# Altium PCB IndicationBoard.PcbDoc
Units mm, origin at the board's own origin, x right, y up, seen from the top; angles counter-clockwise.
Board outline 107.5 x 44 mm, 2 copper layers (Top Layer, Bottom Layer), stack 1.571 mm thick; 76 components, 113 nets, 336 pads, 37 vias.
Unrouted connection lines stored in the file: 12.
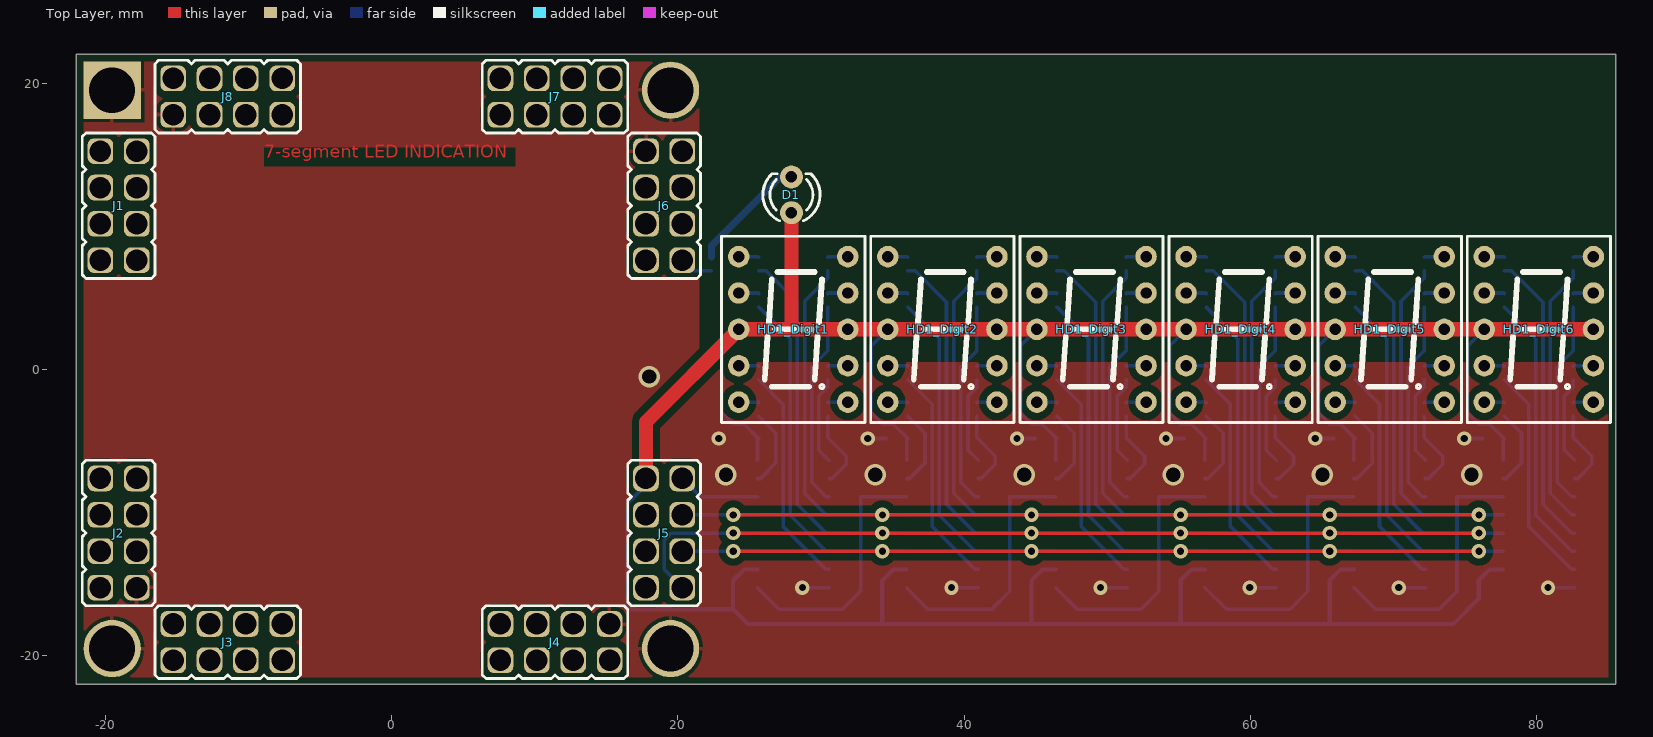
[diagram p0: Top Layer view]
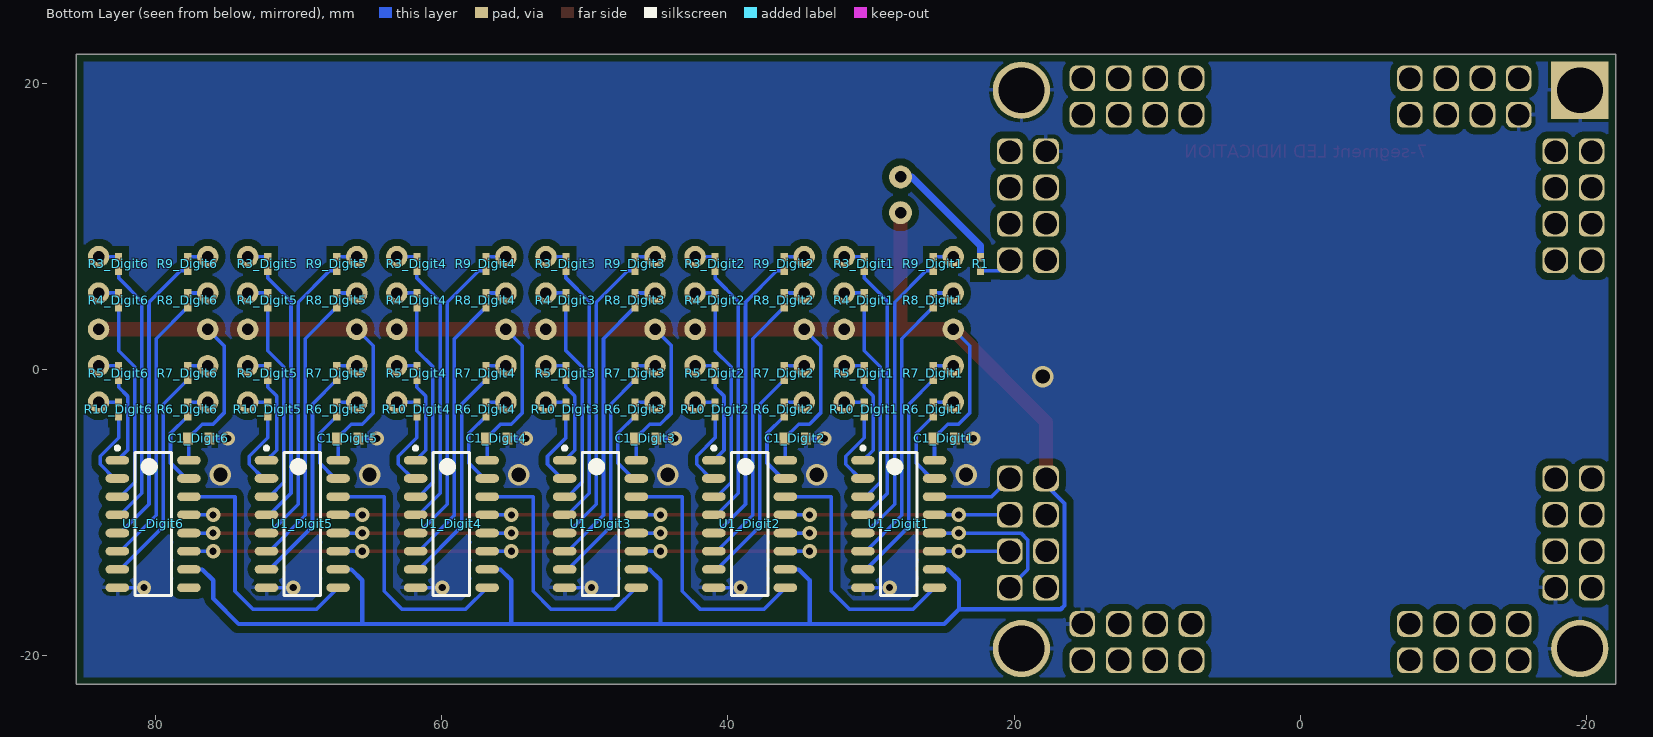
[diagram p1: Bottom Layer view, seen from below]

## Layer stack, top to bottom
Top Solder: solder mask 0.0102, Solder Resist, Dk 3.5
Top Layer: signal copper 0.0356
Dielectric 1: dielectric 1.5, FR-4, Dk 4.8
Bottom Layer: signal copper 0.0356
Bottom Solder: solder mask 0.0102, Solder Resist, Dk 3.5

## Board outline
-22,-22 -22,22 85.5,22 85.5,-22

## Design rules (kind name [scope] priority, off if disabled: settings)
Clearance Clearance_Text_GND [IsText vs InPolygon and InNet('GND')] p1: gap=0
Clearance Clearance_GND_GND [IsTrack and InNet('GND') vs InPolygon and InNet('GND')] p2: gap=0
Clearance Clearance_Polygon(GND) [InPolygon and InNet('GND')] p3: gap=0.5
Clearance [All] p4: gap=0.25
HoleSize [All] p1: absolutevalues=TRUE maxlimit=4 minlimit=0.3 maxpercent=80.000 minpercent=20.000
PolygonConnect PolygonConnect_Via(GND) [InNet('GND') vs IsVia] p1: connectstyle=Direct reliefconductorwidth=0.254 reliefentries=4 polygonreliefangle="90 Angle" airgapwidth=0.254
PolygonConnect [All] p2: connectstyle=Relief reliefconductorwidth=0.254 reliefentries=4 polygonreliefangle="90 Angle" airgapwidth=0.254
RoomDefinition Digit6 [InComponentClass('Digit6')] p1: confinementstyle=ConfineIn formatcopy=TRUE lockcomponents=FALSE outline 74.93,-18.288 85.344,-18.288 85.344,9.525 74.93,9.525
RoomDefinition Digit5 [InComponentClass('Digit5')] p2: confinementstyle=ConfineIn formatcopy=TRUE lockcomponents=FALSE outline 64.516,-18.288 74.93,-18.288 74.93,9.525 64.516,9.525
RoomDefinition Digit4 [InComponentClass('Digit4')] p3: confinementstyle=ConfineIn formatcopy=TRUE lockcomponents=FALSE outline 54.102,-18.288 64.516,-18.288 64.516,9.525 54.102,9.525
RoomDefinition Digit3 [InComponentClass('Digit3')] p4: confinementstyle=ConfineIn formatcopy=TRUE lockcomponents=FALSE outline 43.688,-18.288 54.102,-18.288 54.102,9.525 43.688,9.525
RoomDefinition Digit2 [InComponentClass('Digit2')] p5: confinementstyle=ConfineIn formatcopy=TRUE lockcomponents=FALSE outline 33.274,-18.288 43.688,-18.288 43.688,9.525 33.274,9.525
RoomDefinition Digit1 [InComponentClass('Digit1')] p6: confinementstyle=ConfineIn formatcopy=TRUE lockcomponents=FALSE outline 22.86,-18.288 33.274,-18.288 33.274,9.525 22.86,9.525
RoutingVias [All] p1: holewidth=0.5 width=1 viastyle="Through Hole" minholewidth=0.5 minwidth=1 maxholewidth=1.5 maxwidth=2
ShortCircuit ShortCircuit_Text_GND [InPolygon and InNet('GND') vs IsText] p1: allowed=TRUE
ShortCircuit [All] p2: allowed=FALSE
SolderMaskExpansion [All] p1: expansion=0.102
Width [All] p1: maxlimit=2 minlimit=0.25 preferedwidth=0.3
27 further rules are at their usual default settings.

## Classes and differential pairs
channel class OneDigitSubcircuit: Digit1 Digit2 Digit3 Digit4 Digit5 Digit6
net class OUT[1..6]: OUT6
net class IN[1..6]: IN1 IN2 IN3 IN4 IN5 IN6
component class IndicationBoard: D1 J1 J2 J3 J4 J5 J6 J7 J8 R1
component class Digit6: C1_Digit6 HD1_Digit6 R3_Digit6 R4_Digit6 R5_Digit6 R6_Digit6 R7_Digit6 R8_Digit6 R9_Digit6 R10_Digit6 U1_Digit6
component class Digit5: C1_Digit5 HD1_Digit5 R3_Digit5 R4_Digit5 R5_Digit5 R6_Digit5 R7_Digit5 R8_Digit5 R9_Digit5 R10_Digit5 U1_Digit5
component class Digit4: C1_Digit4 HD1_Digit4 R3_Digit4 R4_Digit4 R5_Digit4 R6_Digit4 R7_Digit4 R8_Digit4 R9_Digit4 R10_Digit4 U1_Digit4
component class Digit3: C1_Digit3 HD1_Digit3 R3_Digit3 R4_Digit3 R5_Digit3 R6_Digit3 R7_Digit3 R8_Digit3 R9_Digit3 R10_Digit3 U1_Digit3
component class Digit2: C1_Digit2 HD1_Digit2 R3_Digit2 R4_Digit2 R5_Digit2 R6_Digit2 R7_Digit2 R8_Digit2 R9_Digit2 R10_Digit2 U1_Digit2
component class Digit1: C1_Digit1 HD1_Digit1 R3_Digit1 R4_Digit1 R5_Digit1 R6_Digit1 R7_Digit1 R8_Digit1 R9_Digit1 R10_Digit1 U1_Digit1

## Components (designator, comment, footprint, x,y, rotation, side; value= is the part's Value field where it differs from the comment)
C1_Digit1 "0.1/25" CAP0603 24.892,-4.826 r0 bottom (schematic designator C1)
C1_Digit2 "0.1/25" CAP0603 35.306,-4.826 r0 bottom (schematic designator C1)
C1_Digit3 "0.1/25" CAP0603 45.72,-4.826 r0 bottom (schematic designator C1)
C1_Digit4 "0.1/25" CAP0603 56.134,-4.826 r0 bottom (schematic designator C1)
C1_Digit5 "0.1/25" CAP0603 66.548,-4.826 r0 bottom (schematic designator C1)
C1_Digit6 "0.1/25" CAP0603 76.962,-4.826 r0 bottom (schematic designator C1)
D1 "L-314" "LED 3mm" 27.94,12.192 r90 top
HD1_Digit1 "SA39-11" "39-11 7-segment" 28.067,2.794 r0 top (schematic designator HD1)
HD1_Digit2 "SA39-11" "39-11 7-segment" 38.481,2.794 r0 top (schematic designator HD1)
HD1_Digit3 "SA39-11" "39-11 7-segment" 48.895,2.794 r0 top (schematic designator HD1)
HD1_Digit4 "SA39-11" "39-11 7-segment" 59.309,2.794 r0 top (schematic designator HD1)
HD1_Digit5 "SA39-11" "39-11 7-segment" 69.723,2.794 r0 top (schematic designator HD1)
HD1_Digit6 "SA39-11" "39-11 7-segment" 80.137,2.794 r0 top (schematic designator HD1)
J1 "LEFT" PBDM-8 -19.05,11.43 r270 top
J2 "LEFT" PBDM-8 -19.05,-11.43 r270 top
J3 "BOTTOM" PBDM-8 -11.43,-19.05 r0 top
J4 "BOTTOM" PBDM-8 11.43,-19.05 r0 top
J5 "RIGHT" PBDM-8 19.05,-11.43 r90 top
J6 "RIGHT" PBDM-8 19.05,11.43 r90 top
J7 "TOP" PBDM-8 11.43,19.05 r180 top
J8 "TOP" PBDM-8 -11.43,19.05 r180 top
R1 "1k" RES0402 22.352,7.366 r270 bottom
R3_Digit1 "1k" RES0402 30.48,7.366 r270 bottom (schematic designator R3)
R3_Digit2 "1k" RES0402 40.894,7.366 r270 bottom (schematic designator R3)
R3_Digit3 "1k" RES0402 51.308,7.366 r270 bottom (schematic designator R3)
R3_Digit4 "1k" RES0402 61.722,7.366 r270 bottom (schematic designator R3)
R3_Digit5 "1k" RES0402 72.136,7.366 r270 bottom (schematic designator R3)
R3_Digit6 "1k" RES0402 82.55,7.366 r270 bottom (schematic designator R3)
R4_Digit1 "1k" RES0402 30.48,4.826 r270 bottom (schematic designator R4)
R4_Digit2 "1k" RES0402 40.894,4.826 r270 bottom (schematic designator R4)
R4_Digit3 "1k" RES0402 51.308,4.826 r270 bottom (schematic designator R4)
R4_Digit4 "1k" RES0402 61.722,4.826 r270 bottom (schematic designator R4)
R4_Digit5 "1k" RES0402 72.136,4.826 r270 bottom (schematic designator R4)
R4_Digit6 "1k" RES0402 82.55,4.826 r270 bottom (schematic designator R4)
R5_Digit1 "1k" RES0402 30.48,-0.254 r270 bottom (schematic designator R5)
R5_Digit2 "1k" RES0402 40.894,-0.254 r270 bottom (schematic designator R5)
R5_Digit3 "1k" RES0402 51.308,-0.254 r270 bottom (schematic designator R5)
R5_Digit4 "1k" RES0402 61.722,-0.254 r270 bottom (schematic designator R5)
R5_Digit5 "1k" RES0402 72.136,-0.254 r270 bottom (schematic designator R5)
R5_Digit6 "1k" RES0402 82.55,-0.254 r270 bottom (schematic designator R5)
R6_Digit1 "1k" RES0402 25.654,-2.794 r270 bottom (schematic designator R6)
R6_Digit2 "1k" RES0402 36.068,-2.794 r270 bottom (schematic designator R6)
R6_Digit3 "1k" RES0402 46.482,-2.794 r270 bottom (schematic designator R6)
R6_Digit4 "1k" RES0402 56.896,-2.794 r270 bottom (schematic designator R6)
R6_Digit5 "1k" RES0402 67.31,-2.794 r270 bottom (schematic designator R6)
R6_Digit6 "1k" RES0402 77.724,-2.794 r270 bottom (schematic designator R6)
R7_Digit1 "1k" RES0402 25.654,-0.254 r270 bottom (schematic designator R7)
R7_Digit2 "1k" RES0402 36.068,-0.254 r270 bottom (schematic designator R7)
R7_Digit3 "1k" RES0402 46.482,-0.254 r270 bottom (schematic designator R7)
R7_Digit4 "1k" RES0402 56.896,-0.254 r270 bottom (schematic designator R7)
R7_Digit5 "1k" RES0402 67.31,-0.254 r270 bottom (schematic designator R7)
R7_Digit6 "1k" RES0402 77.724,-0.254 r270 bottom (schematic designator R7)
R8_Digit1 "1k" RES0402 25.654,4.826 r270 bottom (schematic designator R8)
R8_Digit2 "1k" RES0402 36.068,4.826 r270 bottom (schematic designator R8)
R8_Digit3 "1k" RES0402 46.482,4.826 r270 bottom (schematic designator R8)
R8_Digit4 "1k" RES0402 56.896,4.826 r270 bottom (schematic designator R8)
R8_Digit5 "1k" RES0402 67.31,4.826 r270 bottom (schematic designator R8)
R8_Digit6 "1k" RES0402 77.724,4.826 r270 bottom (schematic designator R8)
R9_Digit1 "1k" RES0402 25.654,7.366 r270 bottom (schematic designator R9)
R9_Digit2 "1k" RES0402 36.068,7.366 r270 bottom (schematic designator R9)
R9_Digit3 "1k" RES0402 46.482,7.366 r270 bottom (schematic designator R9)
R9_Digit4 "1k" RES0402 56.896,7.366 r270 bottom (schematic designator R9)
R9_Digit5 "1k" RES0402 67.31,7.366 r270 bottom (schematic designator R9)
R9_Digit6 "1k" RES0402 77.724,7.366 r270 bottom (schematic designator R9)
R10_Digit1 "1k" RES0402 30.48,-2.794 r270 bottom (schematic designator R10)
R10_Digit2 "1k" RES0402 40.894,-2.794 r270 bottom (schematic designator R10)
R10_Digit3 "1k" RES0402 51.308,-2.794 r270 bottom (schematic designator R10)
R10_Digit4 "1k" RES0402 61.722,-2.794 r270 bottom (schematic designator R10)
R10_Digit5 "1k" RES0402 72.136,-2.794 r270 bottom (schematic designator R10)
R10_Digit6 "1k" RES0402 82.55,-2.794 r270 bottom (schematic designator R10)
U1_Digit1 "74HC595D" SO16 28.067,-10.795 r180 bottom (schematic designator U1)
U1_Digit2 "74HC595D" SO16 38.481,-10.795 r180 bottom (schematic designator U1)
U1_Digit3 "74HC595D" SO16 48.895,-10.795 r180 bottom (schematic designator U1)
U1_Digit4 "74HC595D" SO16 59.309,-10.795 r180 bottom (schematic designator U1)
U1_Digit5 "74HC595D" SO16 69.723,-10.795 r180 bottom (schematic designator U1)
U1_Digit6 "74HC595D" SO16 80.137,-10.795 r180 bottom (schematic designator U1)

## Footprints (in the part's own frame and the unit in brackets; to place one, negate y for a bottom-side part, rotate by r counter-clockwise, add the part's x,y. Pads: shape width x height; smd on the part's side, far side on the other; paste and mask are expansions set on the pad)
"39-11 7-segment" [mm]
  round 1.5 hole 0.8: 1(-3.81,5.08) 2(-3.81,2.54) 3(-3.81,0) 4(-3.81,-2.54) 5(-3.81,-5.08) 6(3.81,-5.08) 7(3.81,-2.54) 8(3.81,0) 9(3.81,2.54) 10(3.81,5.08)
  silkscreen extent -5,-6.5 5,6.5, body extent -5,-6.5 5,6.5, height 7
CAP0603 [mm]
  rect 0.7x0.85 smd: 1(-0.75,0) 2(0.75,0)
  body extent -0.8,-0.4 0.8,0.4, height 0.3
"LED 3mm" [mm] "3 mm diameter LED"
  round 1.6 hole 0.8: 1(1.25,0) 2(-1.25,0)
  silkscreen extent -1.81,-2 1.47,2, body extent -2,-2 1.52,2, height 5.8
PBDM-8 [mm] "5-pin interboard connector, pitch 2.54 mm"
  rrect50% 1.79x1.79 hole 1.5: 1(-3.81,-1.27) 2(-3.81,1.27) 3(-1.27,-1.27) 4(-1.27,1.27) 5(1.27,-1.27) 6(1.27,1.27) 7(3.81,-1.27) 8(3.81,1.27)
  silkscreen extent -5.08,-2.54 5.08,2.54, body extent -5.08,-2.54 5.08,2.54, height 3
RES0402 [mm]
  rect 0.6x0.5 smd: 1(-0.475,0) 2(0.475,0)
  body extent -0.53,-0.28 0.53,0.28, height 0.35
SO16 [mm]
  oval 1.65x0.6 smd: 1(-2.5,4.445) 2(-2.5,3.175) 3(-2.5,1.905) 4(-2.5,0.635) 5(-2.5,-0.635) 6(-2.5,-1.905) 7(-2.5,-3.175) 8(-2.5,-4.445) 9(2.5,-4.445) 10(2.5,-3.175) 11(2.5,-1.905) 12(2.5,-0.635) 13(2.5,0.635) 14(2.5,1.905) 15(2.5,3.175) 16(2.5,4.445)
  silkscreen extent -2.63,-5 1.27,5.42, body extent -2,-5 2,5, height 1.75

## Part data
C1_Digit1 C1_Digit2 C1_Digit3 C1_Digit4 C1_Digit5 C1_Digit6: library part CAP0603, "Ceramic chip capacitor 0603"
D1: "3-mm LED"
HD1_Digit1 HD1_Digit2 HD1_Digit3 HD1_Digit4 HD1_Digit5 HD1_Digit6: "9.9mm (0.39INCH) Single Digit 7-Segment Numeric Display (Common Anode)"
J1 J2 J3 J4 J5 J6 J7 J8: library part PBDM-8, "2x4-pin header, pitch 2.54 mm"
R1 R3_Digit1 R3_Digit2 R3_Digit3 R3_Digit4 R3_Digit5 R3_Digit6 R4_Digit1 R4_Digit2 R4_Digit3 R4_Digit4 R4_Digit5 R4_Digit6 R5_Digit1 R5_Digit2 R5_Digit3 R5_Digit4 R5_Digit5 R5_Digit6 R6_Digit1 R6_Digit2 R6_Digit3 R6_Digit4 R6_Digit5 R6_Digit6 R7_Digit1 R7_Digit2 R7_Digit3 R7_Digit4 R7_Digit5 R7_Digit6 R8_Digit1 R8_Digit2 R8_Digit3 R8_Digit4 R8_Digit5 R8_Digit6 R9_Digit1 R9_Digit2 R9_Digit3 R9_Digit4 R9_Digit5 R9_Digit6 R10_Digit1 R10_Digit2 R10_Digit3 R10_Digit4 R10_Digit5 R10_Digit6: library part RES0402, "Ceramic chip resistor"
U1_Digit1 U1_Digit2 U1_Digit3 U1_Digit4 U1_Digit5 U1_Digit6: "8-bit serial-in, serial or parallel-out shift register with output latches; 3-state"

## Free pads (board coordinates)
  round 4 hole 3.2: 0(-19.5,-19.5) 0(19.5,-19.5) 0(19.5,19.5)
  rect 4x4 hole 3.2: 0(-19.5,19.5)

## Via types
v1: diameter 1, hole 0.5, Top Layer to Bottom Layer, 30 vias
v2: diameter 1.5, hole 1, Top Layer to Bottom Layer, 7 vias

## Nets (pads, with @x,y where several pads share a name; then routed paths per layer and width w, separated by ;. In a path a pad name is that pad's centre, name@x,y a point inside that pad or via, vN(x,y) a via of type N, cw(c..) or ccw(c..) an arc to the next point about the centre after c; other vN are vias at no path point)
+5V: J1.6 J3.6 J5.6 J7.6
+12V: J1.2 J3.2 J5.2 J7.2
+VDD_Digit1: C1_Digit1.2 C1_Digit2.2 C1_Digit3.2 C1_Digit4.2 C1_Digit5.2 C1_Digit6.2 D1.2 HD1_Digit1.3 HD1_Digit1.8 HD1_Digit2.3 HD1_Digit2.8 HD1_Digit3.3 HD1_Digit3.8 HD1_Digit4.3 HD1_Digit4.8 HD1_Digit5.3 HD1_Digit5.8 HD1_Digit6.3 HD1_Digit6.8 J1.8 J3.8 J5.8 J7.8 U1_Digit1.10 U1_Digit1.16 U1_Digit2.10 U1_Digit2.16 U1_Digit3.10 U1_Digit3.16 U1_Digit4.10 U1_Digit4.16 U1_Digit5.10 U1_Digit5.16 U1_Digit6.10 U1_Digit6.16 | length 246.5
  Top Layer w1: J5.8 17.78,-3.683 HD1_Digit1.3 27.94,2.794 ; D1.2 27.94,2.794 ; HD1_Digit6.8 HD1_Digit6.3 HD1_Digit5.8 HD1_Digit5.3 HD1_Digit4.8 HD1_Digit4.3 HD1_Digit3.8 HD1_Digit3.3 HD1_Digit2.8 HD1_Digit2.3 HD1_Digit1.8 27.94,2.794
  Bottom Layer w0.25: HD1_Digit1.3 23.114,1.651 23.114,-3.048 23.888,-3.822 24.638,-3.822 C1_Digit1.2 25.567,-4.901 U1_Digit1.16 ; HD1_Digit2.3 33.528,1.651 33.528,-3.048 34.302,-3.822 35.052,-3.822 C1_Digit2.2 35.981,-4.901 U1_Digit2.16 ; HD1_Digit3.3 43.942,1.651 43.942,-3.048 44.716,-3.822 45.466,-3.822 C1_Digit3.2 46.395,-4.901 U1_Digit3.16 ; HD1_Digit4.3 54.356,1.651 54.356,-3.048 55.13,-3.822 55.88,-3.822 C1_Digit4.2 56.809,-4.901 U1_Digit4.16 ; HD1_Digit5.3 64.77,1.651 64.77,-3.048 65.544,-3.822 66.294,-3.822 C1_Digit5.2 67.223,-4.901 U1_Digit5.16 ; HD1_Digit6.3 75.184,1.651 75.184,-3.048 75.958,-3.822 76.708,-3.822 C1_Digit6.2 77.637,-4.901 U1_Digit6.16
  Bottom Layer w0.3: J5.8 17.78,-8.066 16.485,-9.361 16.485,-16.485 16.75,-16.75 23.862,-16.75 ; 23.876,-14.732 24.638,-13.97 ; U1_Digit1.10 24.638,-13.97 ; U1_Digit2.10 35.052,-13.97 34.29,-14.732 34.29,-17.78 ; U1_Digit3.10 45.466,-13.97 44.704,-14.732 44.704,-17.78 ; U1_Digit4.10 55.88,-13.97 55.118,-14.732 55.118,-17.78 ; U1_Digit5.10 66.294,-13.97 65.532,-14.732 65.532,-17.78 ; U1_Digit6.10 76.708,-13.97 75.946,-14.732 75.946,-16.002 74.168,-17.78 65.532,-17.78 ; 23.862,-16.75 24.892,-17.78 34.29,-17.78 ; 23.862,-16.75 23.862,-14.732 24.624,-13.97 24.638,-13.97 ; 34.29,-17.78 44.704,-17.78 ; 44.704,-17.78 55.118,-17.78 ; 55.118,-17.78 65.532,-17.78
CLK: J5.3 U1_Digit1.11 U1_Digit2.11 U1_Digit3.11 U1_Digit4.11 U1_Digit5.11 U1_Digit6.11 | length 65.8
  Top Layer w0.25: v1(23.876,-12.7) v1(34.29,-12.7) v1(44.704,-12.7) v1(55.118,-12.7) v1(65.532,-12.7) v1(75.946,-12.7)
  Bottom Layer w0.25: J5.3 v1(23.876,-12.7) U1_Digit1.11 ; v1(34.29,-12.7) U1_Digit2.11 ; v1(44.704,-12.7) U1_Digit3.11 ; v1(55.118,-12.7) U1_Digit4.11 ; v1(65.532,-12.7) U1_Digit5.11 ; v1(75.946,-12.7) U1_Digit6.11
GND: C1_Digit1.1 C1_Digit2.1 C1_Digit3.1 C1_Digit4.1 C1_Digit5.1 C1_Digit6.1 J2.8 J4.8 J6.8 J8.8 pad.0 U1_Digit1.8 U1_Digit2.8 U1_Digit3.8 U1_Digit4.8 U1_Digit5.8 U1_Digit6.8 | length 17.6
  Bottom Layer w0.25: v1(28.702,-15.24) U1_Digit1.8 ; v1(33.274,-4.826) C1_Digit2.1 ; v1(39.116,-15.24) U1_Digit2.8 ; v1(43.688,-4.826) C1_Digit3.1 ; v1(49.53,-15.24) U1_Digit3.8 ; v1(54.102,-4.826) C1_Digit4.1 ; v1(59.944,-15.24) U1_Digit4.8 ; v1(64.516,-4.826) C1_Digit5.1 ; v1(70.358,-15.24) U1_Digit5.8 ; v1(74.93,-4.826) C1_Digit6.1 ; v1(80.772,-15.24) U1_Digit6.8
  other v1: 22.86,-4.826
  other v2: 23.368,-7.366 33.782,-7.366 44.196,-7.366 54.61,-7.366 65.024,-7.366 75.438,-7.366 18,-0.5
IN1: J5.7 U1_Digit1.14 | length 5.8
  Bottom Layer w0.25: J5.7 21.59,-8.89 U1_Digit1.14
IN2: U1_Digit1.9 U1_Digit2.14 | length 18.2
  Bottom Layer w0.25: U1_Digit1.9 27.091,-16.764 31.496,-16.764 32.766,-15.494 32.766,-8.89 U1_Digit2.14
IN3: U1_Digit2.9 U1_Digit3.14 | length 18.2
  Bottom Layer w0.25: U1_Digit2.9 37.505,-16.764 41.91,-16.764 43.18,-15.494 43.18,-8.89 U1_Digit3.14
IN4: U1_Digit3.9 U1_Digit4.14 | length 18.2
  Bottom Layer w0.25: U1_Digit3.9 47.919,-16.764 52.324,-16.764 53.594,-15.494 53.594,-8.89 U1_Digit4.14
IN5: U1_Digit4.9 U1_Digit5.14 | length 18.2
  Bottom Layer w0.25: U1_Digit4.9 58.333,-16.764 62.738,-16.764 64.008,-15.494 64.008,-8.89 U1_Digit5.14
IN6: U1_Digit5.9 U1_Digit6.14 | length 18.2
  Bottom Layer w0.25: U1_Digit5.9 68.747,-16.764 73.152,-16.764 74.422,-15.494 74.422,-8.89 U1_Digit6.14
LATCH: J5.1 U1_Digit1.12 U1_Digit2.12 U1_Digit3.12 U1_Digit4.12 U1_Digit5.12 U1_Digit6.12 | length 71.1
  Top Layer w0.25: v1(23.876,-11.43) v1(34.29,-11.43) v1(44.704,-11.43) v1(55.118,-11.43) v1(65.532,-11.43) v1(75.946,-11.43)
  Bottom Layer w0.25: J5.1 19.05,-13.97 19.05,-11.912 19.532,-11.43 v1(23.876,-11.43) U1_Digit1.12 ; v1(34.29,-11.43) U1_Digit2.12 ; v1(44.704,-11.43) U1_Digit3.12 ; v1(55.118,-11.43) U1_Digit4.12 ; v1(65.532,-11.43) U1_Digit5.12 ; v1(75.946,-11.43) U1_Digit6.12
NetD1_1: D1.1 R1.1 | length 8.4
  Bottom Layer w0.5: R1.1 22.352,8.636 27.158,13.442 D1.1
NetHD1_Digit1_1: HD1_Digit1.1 R9_Digit1.1 | length 1.4
  Bottom Layer w0.25: HD1_Digit1.1 25.621,7.874 R9_Digit1.1
NetHD1_Digit1_2: HD1_Digit1.2 R8_Digit1.1 | length 1.4
  Bottom Layer w0.25: HD1_Digit1.2 25.621,5.334 R8_Digit1.1
NetHD1_Digit1_4: HD1_Digit1.4 R7_Digit1.1 | length 1.4
  Bottom Layer w0.25: HD1_Digit1.4 25.621,0.254 R7_Digit1.1
NetHD1_Digit1_5: HD1_Digit1.5 R6_Digit1.1 | length 1.4
  Bottom Layer w0.25: HD1_Digit1.5 25.621,-2.286 R6_Digit1.1
NetHD1_Digit1_6: HD1_Digit1.6 R10_Digit1.1 | length 1.4
  Bottom Layer w0.25: R10_Digit1.1 30.513,-2.286 HD1_Digit1.6
NetHD1_Digit1_7: HD1_Digit1.7 R5_Digit1.1 | length 1.4
  Bottom Layer w0.25: R5_Digit1.1 30.513,0.254 HD1_Digit1.7
NetHD1_Digit1_9: HD1_Digit1.9 R4_Digit1.1 | length 1.4
  Bottom Layer w0.25: R4_Digit1.1 30.513,5.334 HD1_Digit1.9
NetHD1_Digit1_10: HD1_Digit1.10 R3_Digit1.1 | length 1.4
  Bottom Layer w0.25: R3_Digit1.1 30.513,7.874 HD1_Digit1.10
NetHD1_Digit2_1: HD1_Digit2.1 R9_Digit2.1 | length 1.4
  Bottom Layer w0.25: HD1_Digit2.1 36.035,7.874 R9_Digit2.1
NetHD1_Digit2_2: HD1_Digit2.2 R8_Digit2.1 | length 1.4
  Bottom Layer w0.25: HD1_Digit2.2 36.035,5.334 R8_Digit2.1
NetHD1_Digit2_4: HD1_Digit2.4 R7_Digit2.1 | length 1.4
  Bottom Layer w0.25: HD1_Digit2.4 36.035,0.254 R7_Digit2.1
NetHD1_Digit2_5: HD1_Digit2.5 R6_Digit2.1 | length 1.4
  Bottom Layer w0.25: HD1_Digit2.5 36.035,-2.286 R6_Digit2.1
NetHD1_Digit2_6: HD1_Digit2.6 R10_Digit2.1 | length 1.4
  Bottom Layer w0.25: R10_Digit2.1 40.927,-2.286 HD1_Digit2.6
NetHD1_Digit2_7: HD1_Digit2.7 R5_Digit2.1 | length 1.4
  Bottom Layer w0.25: R5_Digit2.1 40.927,0.254 HD1_Digit2.7
NetHD1_Digit2_9: HD1_Digit2.9 R4_Digit2.1 | length 1.4
  Bottom Layer w0.25: R4_Digit2.1 40.927,5.334 HD1_Digit2.9
NetHD1_Digit2_10: HD1_Digit2.10 R3_Digit2.1 | length 1.4
  Bottom Layer w0.25: R3_Digit2.1 40.927,7.874 HD1_Digit2.10
NetHD1_Digit3_1: HD1_Digit3.1 R9_Digit3.1 | length 1.4
  Bottom Layer w0.25: HD1_Digit3.1 46.449,7.874 R9_Digit3.1
NetHD1_Digit3_2: HD1_Digit3.2 R8_Digit3.1 | length 1.4
  Bottom Layer w0.25: HD1_Digit3.2 46.449,5.334 R8_Digit3.1
NetHD1_Digit3_4: HD1_Digit3.4 R7_Digit3.1 | length 1.4
  Bottom Layer w0.25: HD1_Digit3.4 46.449,0.254 R7_Digit3.1
NetHD1_Digit3_5: HD1_Digit3.5 R6_Digit3.1 | length 1.4
  Bottom Layer w0.25: HD1_Digit3.5 46.449,-2.286 R6_Digit3.1
NetHD1_Digit3_6: HD1_Digit3.6 R10_Digit3.1 | length 1.4
  Bottom Layer w0.25: R10_Digit3.1 51.341,-2.286 HD1_Digit3.6
NetHD1_Digit3_7: HD1_Digit3.7 R5_Digit3.1 | length 1.4
  Bottom Layer w0.25: R5_Digit3.1 51.341,0.254 HD1_Digit3.7
NetHD1_Digit3_9: HD1_Digit3.9 R4_Digit3.1 | length 1.4
  Bottom Layer w0.25: R4_Digit3.1 51.341,5.334 HD1_Digit3.9
NetHD1_Digit3_10: HD1_Digit3.10 R3_Digit3.1 | length 1.4
  Bottom Layer w0.25: R3_Digit3.1 51.341,7.874 HD1_Digit3.10
NetHD1_Digit4_1: HD1_Digit4.1 R9_Digit4.1 | length 1.4
  Bottom Layer w0.25: HD1_Digit4.1 56.863,7.874 R9_Digit4.1
NetHD1_Digit4_2: HD1_Digit4.2 R8_Digit4.1 | length 1.4
  Bottom Layer w0.25: HD1_Digit4.2 56.863,5.334 R8_Digit4.1
NetHD1_Digit4_4: HD1_Digit4.4 R7_Digit4.1 | length 1.4
  Bottom Layer w0.25: HD1_Digit4.4 56.863,0.254 R7_Digit4.1
NetHD1_Digit4_5: HD1_Digit4.5 R6_Digit4.1 | length 1.4
  Bottom Layer w0.25: HD1_Digit4.5 56.863,-2.286 R6_Digit4.1
NetHD1_Digit4_6: HD1_Digit4.6 R10_Digit4.1 | length 1.4
  Bottom Layer w0.25: R10_Digit4.1 61.755,-2.286 HD1_Digit4.6
NetHD1_Digit4_7: HD1_Digit4.7 R5_Digit4.1 | length 1.4
  Bottom Layer w0.25: R5_Digit4.1 61.755,0.254 HD1_Digit4.7
NetHD1_Digit4_9: HD1_Digit4.9 R4_Digit4.1 | length 1.4
  Bottom Layer w0.25: R4_Digit4.1 61.755,5.334 HD1_Digit4.9
NetHD1_Digit4_10: HD1_Digit4.10 R3_Digit4.1 | length 1.4
  Bottom Layer w0.25: R3_Digit4.1 61.755,7.874 HD1_Digit4.10
NetHD1_Digit5_1: HD1_Digit5.1 R9_Digit5.1 | length 1.4
  Bottom Layer w0.25: HD1_Digit5.1 67.277,7.874 R9_Digit5.1
NetHD1_Digit5_2: HD1_Digit5.2 R8_Digit5.1 | length 1.4
  Bottom Layer w0.25: HD1_Digit5.2 67.277,5.334 R8_Digit5.1
NetHD1_Digit5_4: HD1_Digit5.4 R7_Digit5.1 | length 1.4
  Bottom Layer w0.25: HD1_Digit5.4 67.277,0.254 R7_Digit5.1
NetHD1_Digit5_5: HD1_Digit5.5 R6_Digit5.1 | length 1.4
  Bottom Layer w0.25: HD1_Digit5.5 67.277,-2.286 R6_Digit5.1
NetHD1_Digit5_6: HD1_Digit5.6 R10_Digit5.1 | length 1.4
  Bottom Layer w0.25: R10_Digit5.1 72.169,-2.286 HD1_Digit5.6
NetHD1_Digit5_7: HD1_Digit5.7 R5_Digit5.1 | length 1.4
  Bottom Layer w0.25: R5_Digit5.1 72.169,0.254 HD1_Digit5.7
NetHD1_Digit5_9: HD1_Digit5.9 R4_Digit5.1 | length 1.4
  Bottom Layer w0.25: R4_Digit5.1 72.169,5.334 HD1_Digit5.9
NetHD1_Digit5_10: HD1_Digit5.10 R3_Digit5.1 | length 1.4
  Bottom Layer w0.25: R3_Digit5.1 72.169,7.874 HD1_Digit5.10
NetHD1_Digit6_1: HD1_Digit6.1 R9_Digit6.1 | length 1.4
  Bottom Layer w0.25: HD1_Digit6.1 77.691,7.874 R9_Digit6.1
NetHD1_Digit6_2: HD1_Digit6.2 R8_Digit6.1 | length 1.4
  Bottom Layer w0.25: HD1_Digit6.2 77.691,5.334 R8_Digit6.1
NetHD1_Digit6_4: HD1_Digit6.4 R7_Digit6.1 | length 1.4
  Bottom Layer w0.25: HD1_Digit6.4 77.691,0.254 R7_Digit6.1
NetHD1_Digit6_5: HD1_Digit6.5 R6_Digit6.1 | length 1.4
  Bottom Layer w0.25: HD1_Digit6.5 77.691,-2.286 R6_Digit6.1
NetHD1_Digit6_6: HD1_Digit6.6 R10_Digit6.1 | length 1.4
  Bottom Layer w0.25: R10_Digit6.1 82.583,-2.286 HD1_Digit6.6
NetHD1_Digit6_7: HD1_Digit6.7 R5_Digit6.1 | length 1.4
  Bottom Layer w0.25: R5_Digit6.1 82.583,0.254 HD1_Digit6.7
NetHD1_Digit6_9: HD1_Digit6.9 R4_Digit6.1 | length 1.4
  Bottom Layer w0.25: R4_Digit6.1 82.583,5.334 HD1_Digit6.9
NetHD1_Digit6_10: HD1_Digit6.10 R3_Digit6.1 | length 1.4
  Bottom Layer w0.25: R3_Digit6.1 82.583,7.874 HD1_Digit6.10
NetJ6_1: J6.1 R1.2 | length 2.3
  Bottom Layer w0.25: J6.1 21.049,6.891 R1.2
NetR3_Digit1_2: R3_Digit1.2 U1_Digit1.4 | length 18.6
  Bottom Layer w0.25: R3_Digit1.2 30.48,6.381 28.855,4.756 28.855,-8.658 30.357,-10.16 U1_Digit1.4
NetR3_Digit2_2: R3_Digit2.2 U1_Digit2.4 | length 18.6
  Bottom Layer w0.25: R3_Digit2.2 40.894,6.381 39.269,4.756 39.269,-8.658 40.771,-10.16 U1_Digit2.4
NetR3_Digit3_2: R3_Digit3.2 U1_Digit3.4 | length 18.6
  Bottom Layer w0.25: R3_Digit3.2 51.308,6.381 49.683,4.756 49.683,-8.658 51.185,-10.16 U1_Digit3.4
NetR3_Digit4_2: R3_Digit4.2 U1_Digit4.4 | length 18.6
  Bottom Layer w0.25: R3_Digit4.2 61.722,6.381 60.097,4.756 60.097,-8.658 61.599,-10.16 U1_Digit4.4
NetR3_Digit5_2: R3_Digit5.2 U1_Digit5.4 | length 18.6
  Bottom Layer w0.25: R3_Digit5.2 72.136,6.381 70.511,4.756 70.511,-8.658 72.013,-10.16 U1_Digit5.4
NetR3_Digit6_2: R3_Digit6.2 U1_Digit6.4 | length 18.6
  Bottom Layer w0.25: R3_Digit6.2 82.55,6.381 80.925,4.756 80.925,-8.658 82.427,-10.16 U1_Digit6.4
NetR4_Digit1_2: R4_Digit1.2 U1_Digit1.3 | length 14.3
  Bottom Layer w0.25: R4_Digit1.2 30.48,1.301 29.355,0.176 29.355,-7.888 30.357,-8.89 U1_Digit1.3
NetR4_Digit2_2: R4_Digit2.2 U1_Digit2.3 | length 14.3
  Bottom Layer w0.25: R4_Digit2.2 40.894,1.301 39.769,0.176 39.769,-7.888 40.771,-8.89 U1_Digit2.3
NetR4_Digit3_2: R4_Digit3.2 U1_Digit3.3 | length 14.3
  Bottom Layer w0.25: R4_Digit3.2 51.308,1.301 50.183,0.176 50.183,-7.888 51.185,-8.89 U1_Digit3.3
NetR4_Digit4_2: R4_Digit4.2 U1_Digit4.3 | length 14.3
  Bottom Layer w0.25: R4_Digit4.2 61.722,1.301 60.597,0.176 60.597,-7.888 61.599,-8.89 U1_Digit4.3
NetR4_Digit5_2: R4_Digit5.2 U1_Digit5.3 | length 14.3
  Bottom Layer w0.25: R4_Digit5.2 72.136,1.301 71.011,0.176 71.011,-7.888 72.013,-8.89 U1_Digit5.3
NetR4_Digit6_2: R4_Digit6.2 U1_Digit6.3 | length 14.3
  Bottom Layer w0.25: R4_Digit6.2 82.55,1.301 81.425,0.176 81.425,-7.888 82.427,-8.89 U1_Digit6.3
NetR5_Digit1_2: R5_Digit1.2 U1_Digit1.1 | length 6.2
  Bottom Layer w0.25: R5_Digit1.2 30.48,-1.239 29.855,-1.864 29.855,-5.638 U1_Digit1.1
NetR5_Digit2_2: R5_Digit2.2 U1_Digit2.1 | length 6.2
  Bottom Layer w0.25: R5_Digit2.2 40.894,-1.239 40.269,-1.864 40.269,-5.638 U1_Digit2.1
NetR5_Digit3_2: R5_Digit3.2 U1_Digit3.1 | length 6.2
  Bottom Layer w0.25: R5_Digit3.2 51.308,-1.239 50.683,-1.864 50.683,-5.638 U1_Digit3.1
NetR5_Digit4_2: R5_Digit4.2 U1_Digit4.1 | length 6.2
  Bottom Layer w0.25: R5_Digit4.2 61.722,-1.239 61.097,-1.864 61.097,-5.638 U1_Digit4.1
NetR5_Digit5_2: R5_Digit5.2 U1_Digit5.1 | length 6.2
  Bottom Layer w0.25: R5_Digit5.2 72.136,-1.239 71.511,-1.864 71.511,-5.638 U1_Digit5.1
NetR5_Digit6_2: R5_Digit6.2 U1_Digit6.1 | length 6.2
  Bottom Layer w0.25: R5_Digit6.2 82.55,-1.239 81.925,-1.864 81.925,-5.638 U1_Digit6.1
NetR6_Digit1_2: R6_Digit1.2 U1_Digit1.15 | length 5.5
  Bottom Layer w0.25: U1_Digit1.15 25.777,-7.62 26.855,-6.542 26.855,-4.47 R6_Digit1.2
NetR6_Digit2_2: R6_Digit2.2 U1_Digit2.15 | length 5.5
  Bottom Layer w0.25: U1_Digit2.15 36.191,-7.62 37.269,-6.542 37.269,-4.47 R6_Digit2.2
NetR6_Digit3_2: R6_Digit3.2 U1_Digit3.15 | length 5.5
  Bottom Layer w0.25: U1_Digit3.15 46.605,-7.62 47.683,-6.542 47.683,-4.47 R6_Digit3.2
NetR6_Digit4_2: R6_Digit4.2 U1_Digit4.15 | length 5.5
  Bottom Layer w0.25: U1_Digit4.15 57.019,-7.62 58.097,-6.542 58.097,-4.47 R6_Digit4.2
NetR6_Digit5_2: R6_Digit5.2 U1_Digit5.15 | length 5.5
  Bottom Layer w0.25: U1_Digit5.15 67.433,-7.62 68.511,-6.542 68.511,-4.47 R6_Digit5.2
NetR6_Digit6_2: R6_Digit6.2 U1_Digit6.15 | length 5.5
  Bottom Layer w0.25: U1_Digit6.15 77.847,-7.62 78.925,-6.542 78.925,-4.47 R6_Digit6.2
NetR7_Digit1_2: R7_Digit1.2 U1_Digit1.7 | length 15.4
  Bottom Layer w0.25: R7_Digit1.2 27.355,-2.43 27.355,-10.968 30.357,-13.97 U1_Digit1.7
NetR7_Digit2_2: R7_Digit2.2 U1_Digit2.7 | length 15.4
  Bottom Layer w0.25: R7_Digit2.2 37.769,-2.43 37.769,-10.968 40.771,-13.97 U1_Digit2.7
NetR7_Digit3_2: R7_Digit3.2 U1_Digit3.7 | length 15.4
  Bottom Layer w0.25: R7_Digit3.2 48.183,-2.43 48.183,-10.968 51.185,-13.97 U1_Digit3.7
NetR7_Digit4_2: R7_Digit4.2 U1_Digit4.7 | length 15.4
  Bottom Layer w0.25: R7_Digit4.2 58.597,-2.43 58.597,-10.968 61.599,-13.97 U1_Digit4.7
NetR7_Digit5_2: R7_Digit5.2 U1_Digit5.7 | length 15.4
  Bottom Layer w0.25: R7_Digit5.2 69.011,-2.43 69.011,-10.968 72.013,-13.97 U1_Digit5.7
NetR7_Digit6_2: R7_Digit6.2 U1_Digit6.7 | length 15.4
  Bottom Layer w0.25: R7_Digit6.2 79.425,-2.43 79.425,-10.968 82.427,-13.97 U1_Digit6.7
NetR8_Digit1_2: R8_Digit1.2 U1_Digit1.6 | length 19.2
  Bottom Layer w0.25: R8_Digit1.2 27.855,2.15 27.855,-10.198 30.357,-12.7 U1_Digit1.6
NetR8_Digit2_2: R8_Digit2.2 U1_Digit2.6 | length 19.2
  Bottom Layer w0.25: R8_Digit2.2 38.269,2.15 38.269,-10.198 40.771,-12.7 U1_Digit2.6
NetR8_Digit3_2: R8_Digit3.2 U1_Digit3.6 | length 19.2
  Bottom Layer w0.25: R8_Digit3.2 48.683,2.15 48.683,-10.198 51.185,-12.7 U1_Digit3.6
NetR8_Digit4_2: R8_Digit4.2 U1_Digit4.6 | length 19.2
  Bottom Layer w0.25: R8_Digit4.2 59.097,2.15 59.097,-10.198 61.599,-12.7 U1_Digit4.6
NetR8_Digit5_2: R8_Digit5.2 U1_Digit5.6 | length 19.2
  Bottom Layer w0.25: R8_Digit5.2 69.511,2.15 69.511,-10.198 72.013,-12.7 U1_Digit5.6
NetR8_Digit6_2: R8_Digit6.2 U1_Digit6.6 | length 19.2
  Bottom Layer w0.25: R8_Digit6.2 79.925,2.15 79.925,-10.198 82.427,-12.7 U1_Digit6.6
NetR9_Digit1_2: R9_Digit1.2 U1_Digit1.5 | length 20.8
  Bottom Layer w0.25: R9_Digit1.2 26.163,6.891 28.355,4.699 28.355,-9.428 30.357,-11.43 U1_Digit1.5
NetR9_Digit2_2: R9_Digit2.2 U1_Digit2.5 | length 20.8
  Bottom Layer w0.25: R9_Digit2.2 36.577,6.891 38.769,4.699 38.769,-9.428 40.771,-11.43 U1_Digit2.5
NetR9_Digit3_2: R9_Digit3.2 U1_Digit3.5 | length 20.8
  Bottom Layer w0.25: R9_Digit3.2 46.991,6.891 49.183,4.699 49.183,-9.428 51.185,-11.43 U1_Digit3.5
NetR9_Digit4_2: R9_Digit4.2 U1_Digit4.5 | length 20.8
  Bottom Layer w0.25: R9_Digit4.2 57.405,6.891 59.597,4.699 59.597,-9.428 61.599,-11.43 U1_Digit4.5
NetR9_Digit5_2: R9_Digit5.2 U1_Digit5.5 | length 20.8
  Bottom Layer w0.25: R9_Digit5.2 67.819,6.891 70.011,4.699 70.011,-9.428 72.013,-11.43 U1_Digit5.5
NetR9_Digit6_2: R9_Digit6.2 U1_Digit6.5 | length 20.8
  Bottom Layer w0.25: R9_Digit6.2 78.233,6.891 80.425,4.699 80.425,-9.428 82.427,-11.43 U1_Digit6.5
NetR10_Digit1_2: R10_Digit1.2 U1_Digit1.2 | length 5.5
  Bottom Layer w0.25: R10_Digit1.2 30.48,-4.783 31.767,-6.07 31.767,-6.63 30.777,-7.62 U1_Digit1.2
NetR10_Digit2_2: R10_Digit2.2 U1_Digit2.2 | length 5.5
  Bottom Layer w0.25: R10_Digit2.2 40.894,-4.783 42.181,-6.07 42.181,-6.63 41.191,-7.62 U1_Digit2.2
NetR10_Digit3_2: R10_Digit3.2 U1_Digit3.2 | length 5.5
  Bottom Layer w0.25: R10_Digit3.2 51.308,-4.783 52.595,-6.07 52.595,-6.63 51.605,-7.62 U1_Digit3.2
NetR10_Digit4_2: R10_Digit4.2 U1_Digit4.2 | length 5.5
  Bottom Layer w0.25: R10_Digit4.2 61.722,-4.783 63.009,-6.07 63.009,-6.63 62.019,-7.62 U1_Digit4.2
NetR10_Digit5_2: R10_Digit5.2 U1_Digit5.2 | length 5.5
  Bottom Layer w0.25: R10_Digit5.2 72.136,-4.783 73.423,-6.07 73.423,-6.63 72.433,-7.62 U1_Digit5.2
NetR10_Digit6_2: R10_Digit6.2 U1_Digit6.2 | length 5.5
  Bottom Layer w0.25: R10_Digit6.2 82.55,-4.783 83.837,-6.07 83.837,-6.63 82.847,-7.62 U1_Digit6.2
O\E\: J5.5 U1_Digit1.13 U1_Digit2.13 U1_Digit3.13 U1_Digit4.13 U1_Digit5.13 U1_Digit6.13 | length 65.8
  Top Layer w0.25: v1(23.876,-10.16) v1(34.29,-10.16) v1(44.704,-10.16) v1(55.118,-10.16) v1(65.532,-10.16) v1(75.946,-10.16)
  Bottom Layer w0.25: J5.5 v1(23.876,-10.16) U1_Digit1.13 ; v1(34.29,-10.16) U1_Digit2.13 ; v1(44.704,-10.16) U1_Digit3.13 ; v1(55.118,-10.16) U1_Digit4.13 ; v1(65.532,-10.16) U1_Digit5.13 ; v1(75.946,-10.16) U1_Digit6.13
OUT6: U1_Digit6.9
VBAT: J1.4 J3.4 J5.4 J7.4
pads on no net: J1.1 J1.3 J1.5 J1.7 J2.1 J2.2 J2.3 J2.4 J2.5 J2.6 J2.7 J3.1 J3.3 J3.5 J3.7 J4.1 J4.2 J4.3 J4.4 J4.5 J4.6 J4.7 J6.2 J6.3 J6.4 J6.5 J6.6 J6.7 J7.1 J7.3 J7.5 J7.7 J8.1 J8.2 J8.3 J8.4 J8.5 J8.6 J8.7

## Polygon pours and split planes (outlines as drawn)
GND on Bottom Layer "Bottom-GND" (solid, remove dead copper, pour order 3): -21.5,21.5 -21.5,-21.5 85,-21.5 85,21.5
GND on Top Layer "Top-GND" (solid, remove dead copper, pour order 4): -21.5,21.5 -21.5,-21.5 85,-21.5 85,0.5 21.5,0.5 21.5,21.5

## Other copper
Top Layer:
  text "7-segment LED INDICATION" at -8.89,14.478 h1.52

## Silkscreen, mask and mechanical layers (free items; w line width, h text height)
Board:
  the board outline again, w0.2